# Altium PCB Spike and Hold PCB V2.2.PcbDoc
Units mil, origin at the board's own origin, x right, y up, seen from the top; angles counter-clockwise.
Board outline 1370 x 2015.05 mil, 2 copper layers (Top Layer, Bottom Layer); 21 components, 18 nets, 56 pads, 10 vias.
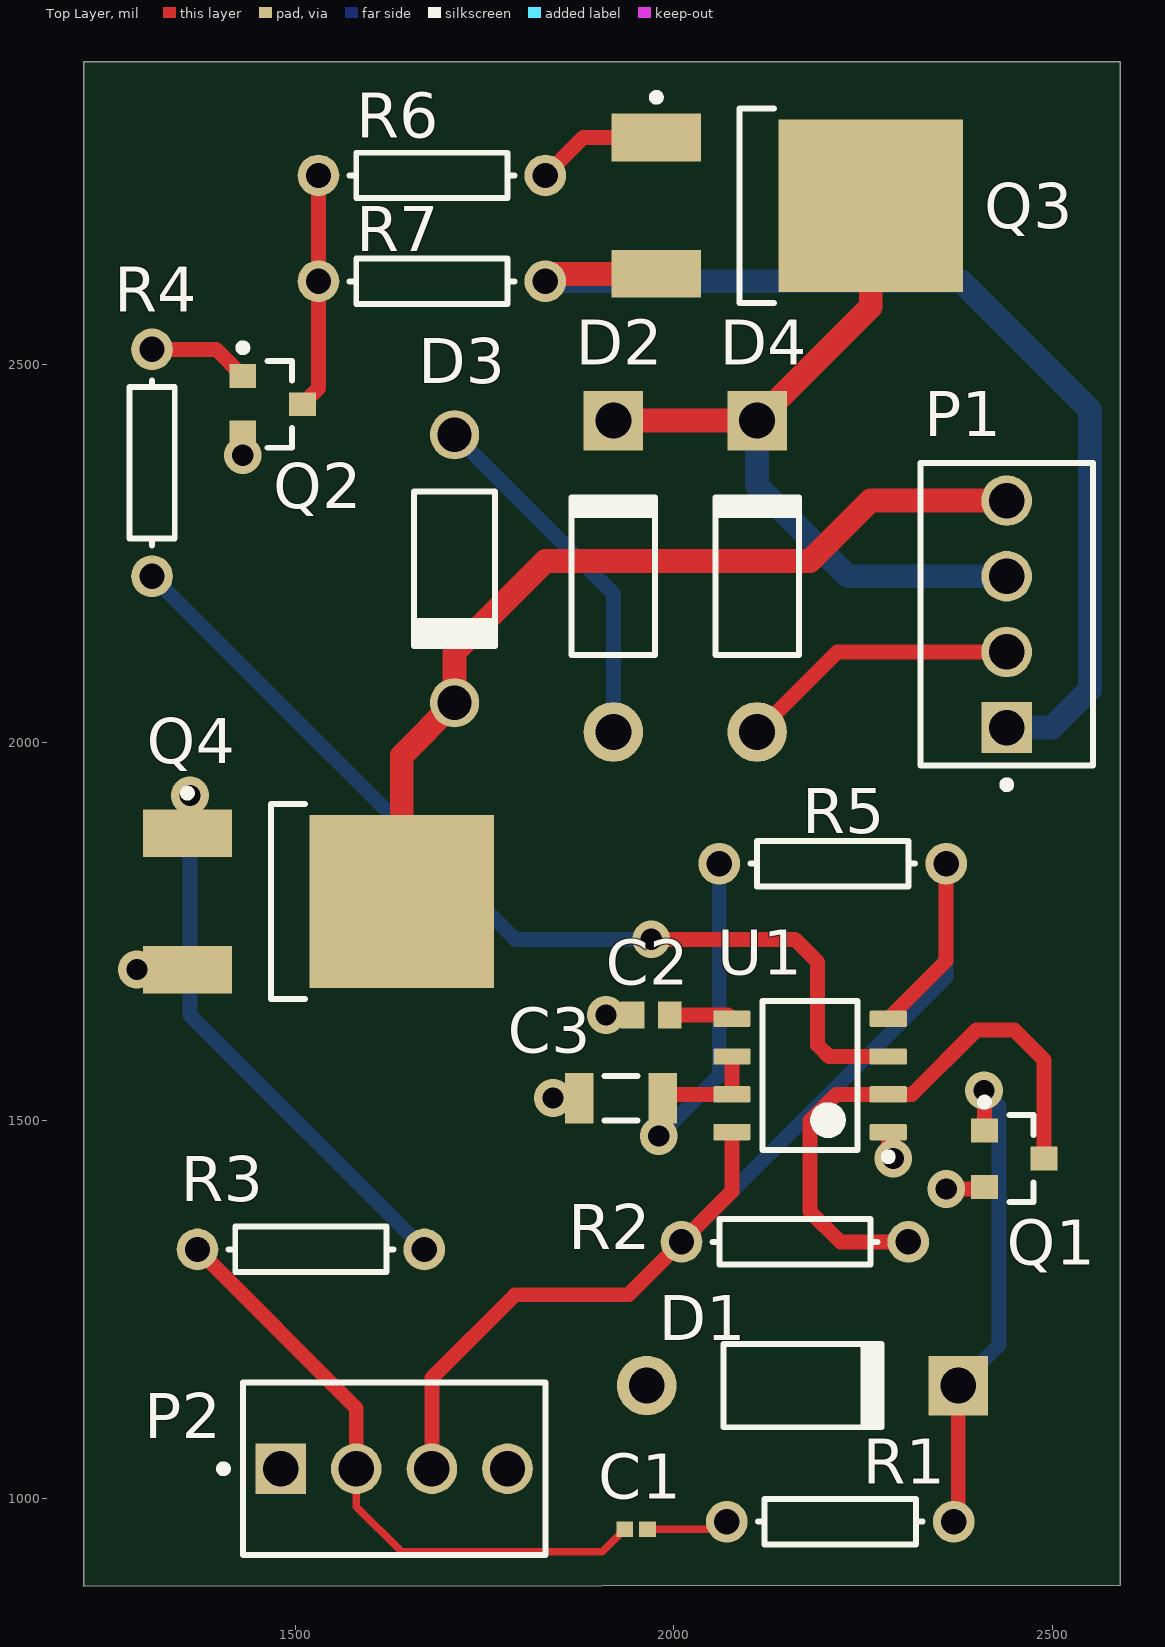
[diagram p0: Top Layer view]
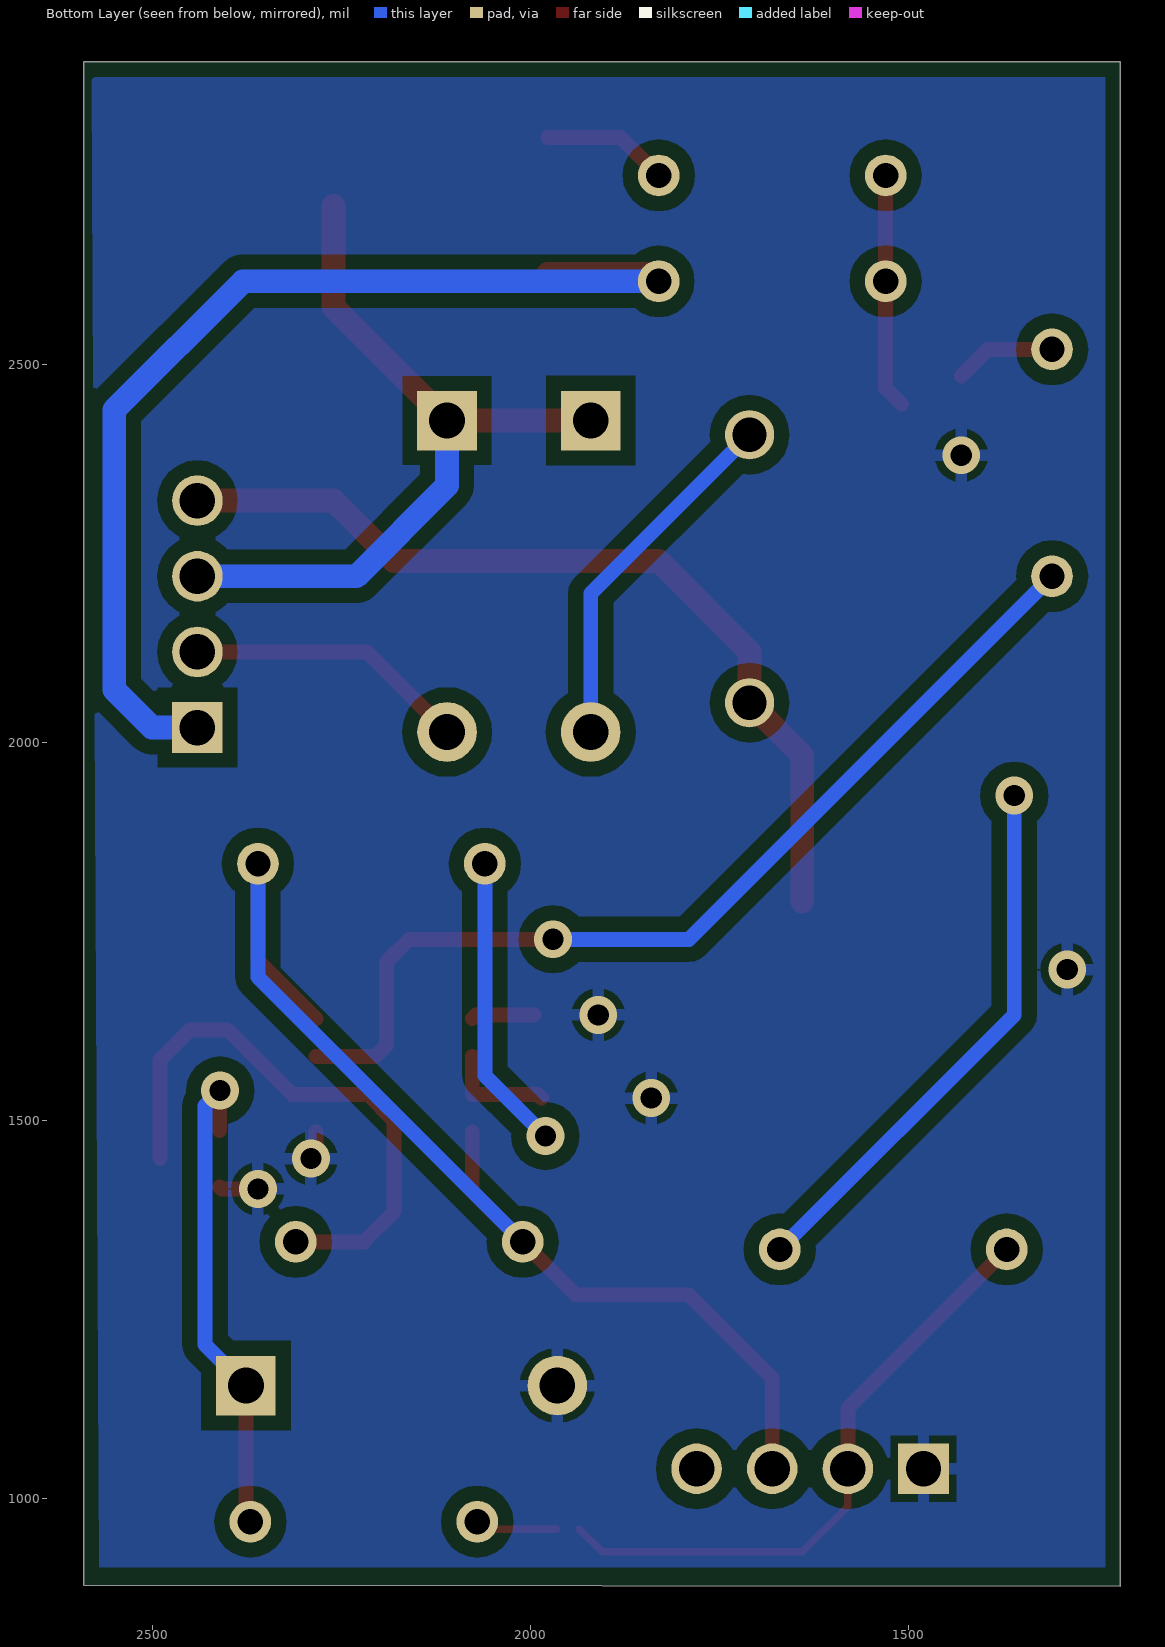
[diagram p1: Bottom Layer view, seen from below]

## Layer stack, top to bottom
Top Solder: solder mask 0.4, Solder Resist, Dk 3.5
Top Layer: signal copper 1.4
Dielectric1: dielectric 12.6, FR-4, Dk 4.8
Bottom Layer: signal copper 1.4
Bottom Solder: solder mask 0.4, Solder Resist, Dk 3.5

## Board outline
1220,884.95 1220,2900 2590,2900 2590,886.22

## Design rules (kind name [scope] priority, off if disabled: settings)
Clearance PolygonPourClearance [InPolygon] p1: gap=19.68 ignorepadtopadclearanceinfootprint=FALSE
Clearance [All] p2: gap=10 ignorepadtopadclearanceinfootprint=FALSE except(0: Arc-Hole Track-Hole SMDPad-Hole THPad-Hole Via-Hole Fill-Hole Poly-Hole Region-Hole Text-Hole; 7.87: SMDPad-SMDPad; 8.66: THPad-THPad; 15.75: Arc-Arc Arc-Track Track-Track)
FabricationTestPointUsage TestPointUsage [All] p1: valid=0 allowmultiple=FALSE
FabricationTestpoint Testpoint [All] p1: side=3 testpointundercomponent=TRUE minsize=40 maxsize=100 preferedsize=60 minholesize=0 maxholesize=40 preferedholesize=32 testpointgrid=1 allowsidetop=TRUE allowsidebottom=TRUE usegrid=TRUE gridtolerance=0.01
PlaneConnect [All] p1: planeconnectstyle=Relief reliefexpansion=20 reliefentries=4 reliefconductorwidth=15.75 reliefairgap=10
PolygonConnect [All] p1: connectstyle=Relief reliefconductorwidth=15.75 reliefentries=4 polygonreliefangle="90 Angle" airgapwidth=10
RoutingVias [All] p1: holewidth=28 width=50 viastyle="Through Hole" minholewidth=28 minwidth=50 maxholewidth=28 maxwidth=50
SilkToSolderMaskClearance SilkscreenOverComponentPads [IsPad] p1: minsilkscreentomaskgap=10 clearancetoexposedcopper=TRUE
SolderMaskExpansion [All] p1: expansion=4
Width [All] p1: maxlimit=10 minlimit=10 preferedwidth=10
26 further rules are at their usual default settings.

## Components (designator, comment, footprint, x,y, rotation, side; value= is the part's Value field where it differs from the comment)
C1 "680 pF" CAPC1005X55X30LL05T10 1950,960 r0 top
C2 "0.01 uF" CAPC1608X87X35LL15T15 1970,1640 r0 top
C3 "1uF" CAPC1206(3216)110_L 1930,1530 r0 top
D1 "Diode 1N4005" DO-41 2170,1150 r0 top
D2 "Diode 1N4005" DO-41 1920,2220 r90 top
D3 "1N4757A" FAIR-DO-41-2_V 1710,2230 r270 top
D4 "Diode 1N4005" DO-41 2110,2220 r90 top
P1 "22-27-2041" MOLX-22-27-2041_V 2440,2170 r270 top
P2 "22-27-2041" MOLX-22-27-2041_V 1630,1040 r180 top
Q1 "MMBTA42LT1G" ONSC-SOT-23-3-318-08_V 2450,1450 r0 top
Q2 "MMBTA42LT1G" ONSC-SOT-23-3-318-08_V 1469.37,2447.4 r0 top
Q3 "MJD127T4G" ONSC-DPAK-3-369C-01_V 2150,2710 r0 top
Q4 "MJD122T4G" ONSC-DPAK-3-369C-01_V 1530,1790 r0 top
R1 "Res1" AXIAL-0.3 2220,970 r0 top value=330
R2 "Res1" AXIAL-0.3 2160,1340 r180 top value=10K
R3 "Res1" AXIAL-0.3 1520,1330 r180 top value=330
R4 "Res1" AXIAL-0.3 1310,2370 r270 top value=330
R5 "Res1" AXIAL-0.3 2210,1840 r180 top value=2K
R6 "Res1" AXIAL-0.3 1680,2750 r0 top value=4.7K
R7 "Res1" AXIAL-0.3 1680,2610 r0 top value=10K
U1 "NE555DR" D0008A_L 2180,1560 r180 top

## Footprints (in the part's own frame and the unit in brackets; to place one, negate y for a bottom-side part, rotate by r counter-clockwise, add the part's x,y. Pads: shape width x height; smd on the part's side, far side on the other; paste and mask are expansions set on the pad)
AXIAL-0.3 [mm] "Axial Device, Thru-Hole; 2 Leads; 0.3 in Pin Spacing"
  round 1.4 hole 0.85: 1(-3.81,0) 2(3.81,0)
  silkscreen extent -2.77,-0.76 2.77,0.76
CAPC1005X55X30LL05T10 [mm] "Chip Capacitor, 2-Leads, Body 1.00x0.50mm, IPC High Density"
  rect 0.56x0.52 smd: 1(-0.38,0) 2(0.38,0)
  body extent -0.53,-0.28 0.53,0.28, height 0.55
CAPC1206(3216)110_L [mm] "Chip Capacitor, Body 3.2x1.6mm, Height 1.1mm, IPC High Density"
  rect 0.95x1.7 smd: 1(-1.4,0) 2(1.4,0)
  silkscreen extent -0.55,-0.75 0.55,0.75, body extent -1.7,-0.9 1.7,0.9, height 1.1
CAPC1608X87X35LL15T15 [mm] "Chip Capacitor, 2-Leads, Body 1.60x0.80mm, IPC High Density"
  rect 0.8x0.9 smd: 1(-0.625,0) 2(0.625,0)
  body extent -0.87,-0.48 0.87,0.48, height 0.87
D0008A_L [mm] "SOIC, 8-Leads, Body 5x4mm, Pitch 1.27mm, IPC High Density"
  rrect18% 1.25x0.55 smd: 1(-2.625,1.905) 2(-2.625,0.635) 3(-2.625,-0.635) 4(-2.625,-1.905) 5(2.625,-1.905) 6(2.625,-0.635) 7(2.625,0.635) 8(2.625,1.905)
  silkscreen extent -2.75,-2.5 1.6,2.85, body extent -3,-2.45 3,2.45, height 1.63
DO-41 [mm] "Diode, Axial; Body 5.2 x 2.7 mm (LxDia. max), Lead Dia. 0.86 mm (max)"
  round 2 hole 1.2: 1(-5.23,0)
  rect 2x2 hole 1.2: 2(5.23,0)
  silkscreen extent -2.65,-1.4 2.75,1.4
FAIR-DO-41-2_V [mm] "2-Leads, Axial leaded, Body 2.72x5.2mm, Pin Spacing 9mm"
  round 1.65 hole 1.15: 1(-4.5,0) 2(4.5,0)
  silkscreen extent -2.6,-1.36 2.6,1.36, body extent -4.93,-1.36 4.93,1.36, height 2.71
MOLX-22-27-2041_V [mm] "CONN, 4-Leads, Body 10.16x5.8mm, Pitch 2.54mm"
  rect 1.7x1.7 hole 1.19: 1(3.81,0)
  round 1.7 hole 1.19: 2(1.27,0) 3(-1.27,0) 4(-3.81,0)
  silkscreen extent -5.08,-2.9 5.85,2.9, body extent -5.08,-2.9 5.08,2.9, height 11.7
ONSC-DPAK-3-369C-01_V [mm] "DPAK, 3-Leads, Body 6.54x6.095mm, Pitch 2.29mm"
  rect 3x1.6 smd: 1(-4.4,2.29) 3(-4.4,-2.29)
  rect 6.2x5.8 smd: 4(2.8,0)
  silkscreen extent -4.52,-3.27 -0.45,3.76, body extent -1.6,-3.27 4.49,3.27, height 2.38
ONSC-SOT-23-3-318-08_V [mm] "SOT23, 3-Leads, Body 2.92x1.3mm, Pitch 0.95mm"
  rect 0.9x0.8 smd: 1(-1,0.95) 2(-1,-0.95) 3(1,0)
  silkscreen extent -1.12,-1.46 0.65,2.02, body extent -0.65,-1.46 0.65,1.46, height 1.11

## Part data
C1: library part CMP-2008-03245-1, Manufacturer=Kemet, Part Number=C0402C681K5RACTU
C2: library part CMP-2006-03044-1, Manufacturer=Kemet, Part Number=C0603C103K5RACTU
C3: library part CMP-1037-04718-1, "CAP 1uF 50V ±10% 1206 (3216 Metric) Thickness 1.1mm SMD", Case-EIA=1206, Case-Metric=3216, Rated Voltage="50 V", Tolerance=±10%, Max Thickness="1.1 mm", Technology=SMT
D1 D2 D4: "1 Amp General Purpose Rectifier", Code_JEDEC=DO-204-AL, ComponentLink1Description="Manufacturer Link", ComponentLink1URL=http://www.fairchildsemi.com/, ComponentLink2Description=Datasheet, ComponentLink2URL=http://www.fairchildsemi.com/ds/1N%2F1N4001.pdf, DatasheetVersion=1998, LatestRevisionDate=17-Jul-2002, LatestRevisionNote="Re-released for DXP Platform.", PackageDescription="Diode, Axial; Body 5.2 x 2.7 mm (LxDia. max), Lead Dia. 0.86 mm (max)", PackageReference=DO-41, PackageVersion=Aug-1999, Published=8-Jun-2000, Publisher="Altium Limited"
D3: library part CMP-0892-00018-1, "Zener Diode, 51V, 1W, 5%, -65 to 200 degC, 2-Pin DO-41, Body 2.72 x 5.2 mm, RoHS", Manufacturer="Fairchild Semiconductor", Operating and Storage Temperature Range="-65 to 200 degC", Test Current IZ (mA)=5, Tolerance=5%, ComponentLink1Description="Manufacturer URL", ComponentLink1URL=http://www.fairchildsemi.com/, ComponentLink2Description=Datasheet, ComponentLink2URL=http://www.fairchildsemi.com/ds/1N/1N4744A.pdf, ComponentLink3Description="Package Specification", ComponentLink3URL=http://www.fairchildsemi.com/dwg/DO/DO41A.pdf, DatasheetVersion="Rev. H3", IR (uA)=5, Mounting Technology="Through Hole", PackageDescription="2-Pin Axial leaded, Body 2.72 x 5.2 mm, Lead Spread 25.4 mm", PackageReference=DO-41-2, PackageVersion="Rev. 2", PartNumber=1N4757A, PD (W)=1, RoHS=TRUE, VZ (Max.) (V)=53.55, VZ (Min.) (V)=48.45, ZZ (Max) (ohm)=95
P1 P2: library part CMP-2000-05243-1, "Male Header, Pitch 2.54 mm, 1 x 4 Position, Height 11.7 mm, Tail Length 3.56 mm, RoHS, Bulk", Current rating=4A, Manufacturer=Molex, Operating temperature=0degCto+75degC, Voltage rating=250V, Contact material=Tinplatedbrass, Datasheet URL=http://www.molex.com/pdm_docs/sd/022272041_sd.pdf, Datasheet Version="Rev. F, 06/2009", Housing material=Nylon(UL94V-0), Manufacturer URL=http://www.molex.com/
Q1 Q2: library part CMP-1048-00662-1, "High Voltage Transistor, NPN Silicon, 3-Pin SOT-23, Pb-Free, Tape and Reel", Manufacturer="On Semiconductor", ComponentLink1Description="Manufacturer URL", ComponentLink1URL=http://www.onsemi.com/, ComponentLink2Description=Datasheet, ComponentLink2URL=http://www.onsemi.cn/pub_link/Collateral/MMBTA42LT1-D.PDF, ComponentLink3Description="Package Specification", ComponentLink3URL=http://www.onsemi.cn/pub_link/Collateral/318-08.PDF, DatasheetVersion="Rev. 12", fT Min (MHz)=50, IC Continuous (A)=0.5, Mounting Technology="Surface Mount", PackageDescription="3-Pin Small Outline Transistor, Body 2.92 x 1.3 mm, Pitch 0.95 mm", PackageReference=SOT-23-3-318-08, PackageVersion="Rev. AP, 11/2009", Packing="Tape and Reel", PartNumber=MMBTA42LT1G, Polarity=NPN, RoHS=TRUE
Q3: library part CMP-1047-00009-1, "Complementary Darlington Power Transistor, 3-Pin DPAK, Pb-Free, Tape and Reel", Manufacturer="On Semiconductor", ComponentLink1Description="Manufacturer URL", ComponentLink1URL=http://www.onsemi.com/, ComponentLink2Description=Datasheet, ComponentLink2URL=http://www.onsemi.com/pub_link/Collateral/MJD122-D.PDF, ComponentLink3Description="Package Specification", ComponentLink3URL=http://www.onsemi.cn/pub_link/Collateral/369C.PDF, DatasheetVersion="Rev. 13", hFE Max (k)=12, IC Continuous (A)=8, Mounting Technology="Surface Mount", PackageDescription="3-Pin Flange Mount, Body 6.54 x 6.095 mm, Pitch 2.29 mm", PackageReference=DPAK-3-369C-01, PackageVersion="Rev. E, 02/2014", Packing="Tape and Reel", PartNumber=MJD127T4G, Polarity=PNP, RoHS=TRUE
Q4: library part CMP-1047-00007-1, "Complementary Darlington Power Transistor, 3-Pin DPAK, Pb-Free, Tape and Reel", Manufacturer="On Semiconductor", ComponentLink1Description="Manufacturer URL", ComponentLink1URL=http://www.onsemi.com/, ComponentLink2Description=Datasheet, ComponentLink2URL=http://www.onsemi.com/pub_link/Collateral/MJD122-D.PDF, ComponentLink3Description="Package Specification", ComponentLink3URL=http://www.onsemi.cn/pub_link/Collateral/369C.PDF, DatasheetVersion="Rev. 13", hFE Max (k)=12, IC Continuous (A)=8, Mounting Technology="Surface Mount", PackageDescription="3-Pin Flange Mount, Body 6.54 x 6.095 mm, Pitch 2.29 mm", PackageReference=DPAK-3-369C-01, PackageVersion="Rev. E, 02/2014", Packing="Tape and Reel", PartNumber=MJD122T4G, Polarity=NPN, RoHS=TRUE
R1 R2 R3 R4 R5 R6 R7: "Resistor", LatestRevisionDate=17-Jul-2002, LatestRevisionNote="Re-released for DXP Platform.", PackageDescription="Axial Device, Thru-Hole; 2 Leads; 0.3 in Pin Spacing", PackageReference=AXIAL-0.3, Published=8-Jun-2000, Publisher="Altium Limited"
U1: library part CMP-1685-00007-1, "Precision Timer, 4.5 to 16 V, 0 to 70 degC, 8-Pin SOIC (D8), Green (RoHS & no Sb/Br), Tape and Reel", Case\Package=SMA, Forward Current="1 A", Forward Voltage="450 mV", Max Operating Temperature="125 degC", Max Surge Current="30 A", Min Operating Temperature="-55 degC", Package Quantity=1, Peak Reverse Current="500 uA", Code_JEDEC=MS-012, ComponentLink1Description="Manufacturer URL", ComponentLink1URL=http://www.ti.com/, ComponentLink2Description=Datasheet, ComponentLink2URL=http://www.ti.com/general/docs/lit/getliterature.tsp?genericPartNumber=NE555&fileType=pdf, ComponentLink3Description="Package Specification", ComponentLink3URL=http://www.ti.com/lit/ml/msoi002j/msoi002j.pdf, DatasheetVersion="SLFS022I, 09/2014", Height="2.44 mm", Length="4.57 mm", Mount="Surface Mount", PackageDescription="8-Pin Small Outline Integrated Circuit, Body 4.9 x 3.9 mm, Pitch 1.27 mm", PackageReference=D0008A, PackageVersion="4040047-3/M, 06/2011", Packaging="Cut Tape", Pins=2, Radiation Hardening=No, REACH SVHC=Unknown, RoHSCompliant=true, Width="2.84 mm"

## Via types
v1: diameter 50, hole 28, Top Layer to Bottom Layer, 10 vias

## Nets (pads, with @x,y where several pads share a name; then routed paths per layer and width w, separated by ;. In a path a pad name is that pad's centre, name@x,y a point inside that pad or via, vN(x,y) a via of type N, cw(c..) or ccw(c..) an arc to the next point about the centre after c; other vN are vias at no path point)
"+ Valve": D2.2 D4.2 P1.3 Q3.4 | length 1001.9
  Top Layer w31.5: D2.2 D4.2 2260.24,2576.14 Q3.4
  Bottom Layer w31.5: D4.2 2110,2340 2230,2220 P1.3
"- Valve": D3.2 P1.4 Q4.4 | length 1171.7
  Top Layer w31.5: Q4.4 1640.24,1983.07 D3.2 1710,2120 1830,2240 2180,2240 2260,2320 P1.4
GND1: C2.1 C3.1 D1.1 P2.1 Q1.2 Q2.2 Q4.3 U1.1 | length 89.5
  Top Layer w19.68: U1.1 2283.35,1456.65 v1(2290,1450) ; v1(2360,1410) 2408.03,1410 Q1.2
  other v1: 1840,1530 1910,1640 1290,1700 1430,2380
NetC1_2: C1.2 R1.1 | length 109.2
  Top Layer w10: C1.2 2060,960 R1.1
NetC2_2: C2.2 U1.5 | length 84.1
  Top Layer w19.68: C2.2 2071.65,1640 U1.5
NetC3_2: C3.2 R5.2 U1.6 U1.7 | length 536.7
  Top Layer w19.68: C3.2 1990.12,1535 U1.7 U1.6
  Bottom Layer w19.68: v1(1980,1480) 2060,1560 R5.2
NetD1_2: D1.2 Q1.1 R1.2 | length 656
  Top Layer w19.68: R1.2 2375.91,975.91 D1.2 ; v1(2410,1540) 2410.63,1539.37 Q1.1
  Bottom Layer w19.68: D1.2 2430,1204.09 2430,1520 v1(2410,1540)
NetD2_1: D2.1 D3.1 | length 480.1
  Bottom Layer w19.68: D3.1 1920,2197.17 D2.1
NetQ1_3: Q1.3 R2.1 U1.2 | length 772.6
  Top Layer w19.68: R2.1 2220,1340 2180,1380 2180,1500 2215,1535 U1.2 2315,1535 2400,1620 2450,1620 2489.37,1580.63 Q1.3
NetQ2_1: Q2.1 R4.1 | length 134.6
  Top Layer w19.68: R4.1 1394.8,2520 Q2.1
NetQ2_3: Q2.3 R6.1 R7.1 | length 311.4
  Top Layer w19.68: Q2.3 1530,2468.66 R7.1 R6.1
NetQ3_1: Q3.1 R6.2 | length 167.5
  Top Layer w19.68: R6.2 1880.16,2800.16 Q3.1
NetQ4_1: Q4.1 R3.1 | length 728.4
  Bottom Layer w19.68: v1(1360,1930) 1360,1640 R3.1
NetR4_2: R4.2 U1.3 | length 1300.8
  Top Layer w19.68: v1(1970,1740) 2160,1740 2190,1710 2190,1600 2205,1585 U1.3
  Bottom Layer w19.68: R4.2 1790,1740 v1(1970,1740)
"Signal +": C1.1 P2.2 R3.2 | length 819.3
  Top Layer w10: P2.2 1580,990 1640,930 1905.04,930 C1.1
  Top Layer w19.68: R3.2 1580,1120 P2.2
V1: P1.1 Q3.3 R7.2 | length 1442
  Top Layer w31.5: R7.2 1839.84,2619.84 Q3.3
  Bottom Layer w31.5: R7.2 2380,2610 2550,2440 2550,2070 2500,2020 P1.1
V2: D4.1 P1.2 | length 373.9
  Top Layer w19.68: D4.1 2215.91,2120 P1.2
VCC: P2.3 R2.2 R5.1 U1.4 U1.8 | length 1578.9
  Top Layer w19.68: P2.3 1680,1160 1790,1270 1940,1270 R2.2 2076.65,1406.65 U1.8 ; U1.4 2360,1711.65 R5.1
  Bottom Layer w19.68: R2.2 2360,1690 R5.1
pads on no net: P2.4

## Polygon pours and split planes (outlines as drawn)
GND1 on Bottom Layer "GND1" (solid, pour order 6): 2570,910 1240,910 1240,2880 2580,2880